# EAGLE board 1IRTG4=Pittonet Benjamin LED (EAGLE 7.7.0)
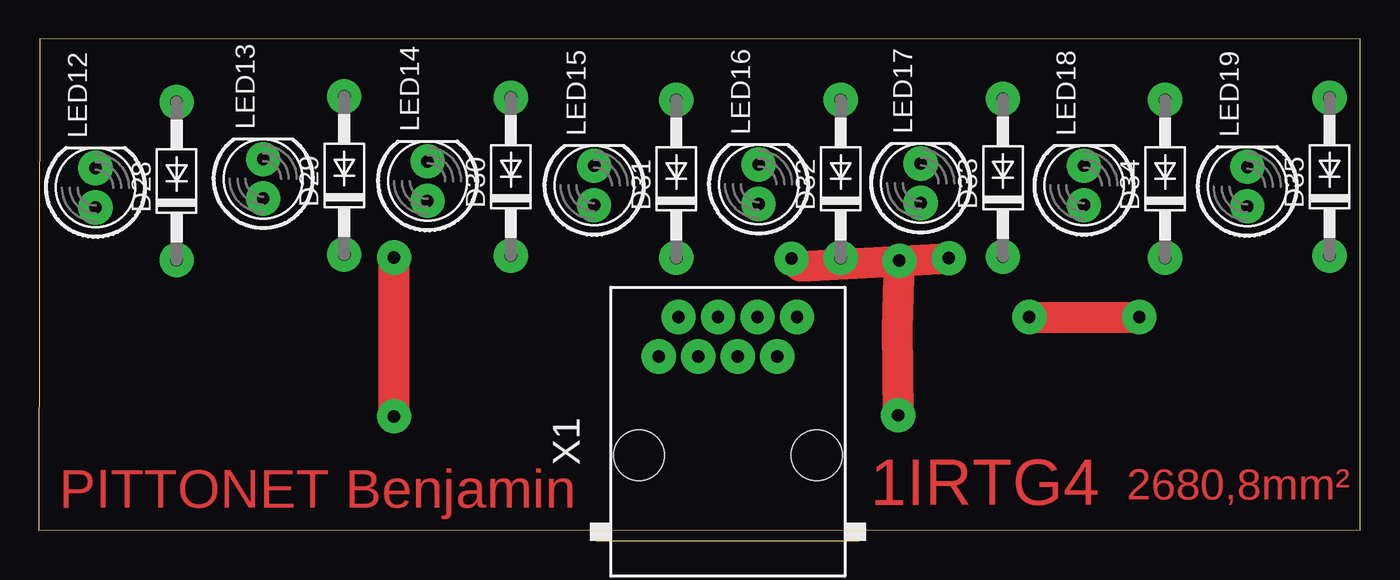
[diagram p0: board, top side]
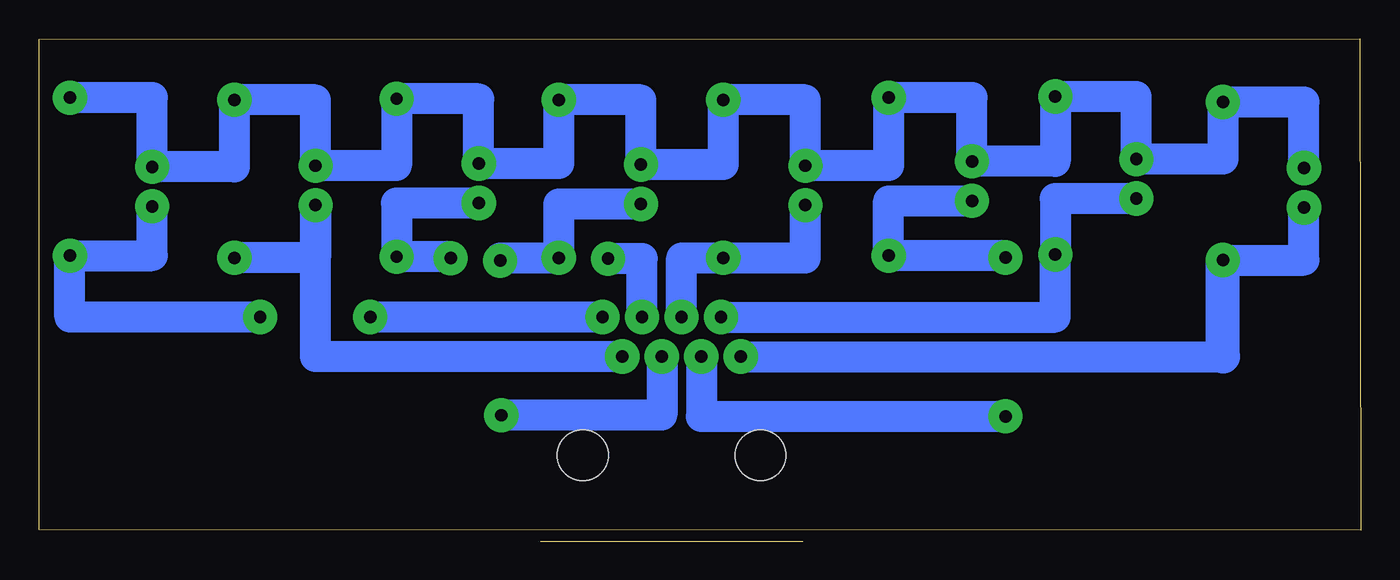
[diagram p1: board, bottom side, seen from below]

Size 85.01 x 31.59 mm. Coordinates in mm from the lower left corner, seen from the top.
Outline: 0,0 85,0.03 85.01,31.58 0.04,31.59 0,0
Copper layers (1*16): Top 0.035mm / dielectric 1.5mm / Bottom 0.035mm
Design rules "default": minimum track width 10mil, minimum drill 24mil, track to track 8mil, track to pad 8mil, pad to pad 8mil, via to via 8mil, smd to smd 8mil, copper to edge 40mil, drill to drill 8mil, minimum pad ring 10mil, minimum via ring 8mil, stop-mask expansion 4mil, vias tented up to drill 0mil, thermal gap 10mil
Net classes: 0 default: width 2 mm, drill 0.8 mm, clearance 0.2 mm

## Footprints (pad centres in the part's own frame; a part is rotated, then mirrored left to right if it is on the bottom)
DO41-10 = drill 0.8 pad 2.2: A 5.08,0; C -5.08,0
LED5MM = drill 0.8 pad 2.2: A -1.27,0; K 1.27,0
RJ45-NO-SHIELD = drill 0.8 pad 2.2: 1 -4.445,6.35; 2 -3.175,8.89; 3 -1.905,6.35; 4 -0.635,8.89; 5 0.635,6.35; 6 1.905,8.89; 7 3.175,6.35; 8 4.445,8.89 | hole 3.251: -5.715,0; 5.715,0

## Placement (x,y rotation side)
D28  1N4004  [DO41-10]  8.86,22.45 90 top
D29  1N4004  [DO41-10]  19.65,22.8 90 top
D30  1N4004  [DO41-10]  30.36,22.73 90 top
D31  1N4004  [DO41-10]  41.01,22.59 90 top
D32  1N4004  [DO41-10]  51.59,22.59 90 top
D33  1N4004  [DO41-10]  62.02,22.66 90 top
D34  1N4004  [DO41-10]  72.45,22.59 90 top
D35  1N4004  [DO41-10]  83.03,22.73 90 top
LED12  [LED5MM]  3.64,22.02 90 top
LED13  [LED5MM]  14.43,22.59 90 top
LED14  [LED5MM]  25.01,22.45 90 top
LED15  [LED5MM]  35.72,22.16 90 top
LED16  [LED5MM]  46.3,22.24 90 top
LED17  [LED5MM]  56.73,22.31 90 top
LED18  [LED5MM]  67.24,22.16 90 top
LED19  [LED5MM]  77.74,22.09 90 top
X1  RJ45-6L-B  [RJ45-NO-SHIELD]  44.32,4.81 0 top

## Library data of the parts
D28-D35 = diode
LED12-LED19 = led
X1 = con-tycoelectronics; MPN: RJ45-6L-B; OC_FARNELL: unknown; OC_NEWARK: 16R6090

## Nets
N$1: D28.A D29.A D30.A D31.A D32.A D33.A D34.A D35.A LED12.K LED13.K LED14.K LED15.K LED16.K LED17.K LED18.K LED19.K
N$2: D28.C LED12.A X1.1
N$3: D29.C LED13.A X1.2
N$4: D30.C LED14.A X1.3
N$5: D31.C LED15.A X1.4
N$6: D32.C LED16.A X1.5
N$7: D33.C LED17.A X1.6
N$8: D34.C LED18.A X1.7
N$9: D35.C LED19.A X1.8

## Tracks (layer width: path | path; a pad name or v marks a point on that pad's centre or on a via)
N$1
  Bottom 2: LED12.K 3.64,27.53 D28.A 8.86,23.86 LED13.K 14.43,27.88 D29.A 19.65,23.72 LED14.K 25,27.81 D30.A 30.36,23.43 LED15.K 35.72,27.67 D31.A 41.01,23.51 LED16.K 46.3,27.67 D32.A 51.59,23.58 LED17.K 56.73,27.74 D33.A 62.02,23.43 LED18.K 67.24,27.67 D34.A 72.45,23.36 LED19.K 77.74,27.81 D35.A
N$2
  Bottom 2: X1.1 8.86,11.16 | D28.C 3.64,17.37 LED12.A
  Bottom 2.2: 8.86,11.16 D28.C
N$3
  Bottom 2: LED13.A 19.65,21.32 D29.C 19.65,13.7 X1.2
N$4  (via drill 0.8 pad 2.2)
  Top 2: v22.85,7.32 v22.85,17.53
  Bottom 2: X1.3 42.42,7.32 v22.85,7.32 | v22.85,17.53 22.85,17.65 D30.C 30.36,21.18 LED14.A
N$5
  Bottom 2: X1.4 43.69,17.51 D31.C 35.72,17.51 LED15.A
N$6  (via drill 0.8 pad 2.2)
  Top 2: v55.29,7.39 55.23,12.99 v55.36,17.33
  Bottom 2: X1.5 44.96,7.39 v55.29,7.39 | v55.36,17.33 55.36,17.51 D32.C 51.59,20.97 LED16.A
N$7  (via drill 0.8 pad 2.2)
  Top 2: v48.42,17.46 48.99,16.97 v58.54,17.49
  Bottom 2: LED17.A 62.02,21.04 D33.C 58.83,17.58 v58.54,17.49 | X1.6 46.23,17.46 v48.42,17.46
N$8
  Bottom 2: X1.7 67.24,11.16 LED18.A 67.24,17.51 D34.C
N$9  (via drill 0.8 pad 2.2)
  Top 2: v63.71,13.7 v70.8,13.7
  Bottom 2: X1.8 | X1.8 v63.71,13.7 | v70.8,13.7 83.03,13.7 D35.C 77.74,17.65 LED19.A

## Text on the board
Top: PITTONET Benjamin | 1IRTG4 | 2680,8mm²